# EAGLE board sensor-board (EAGLE 6.5.0)
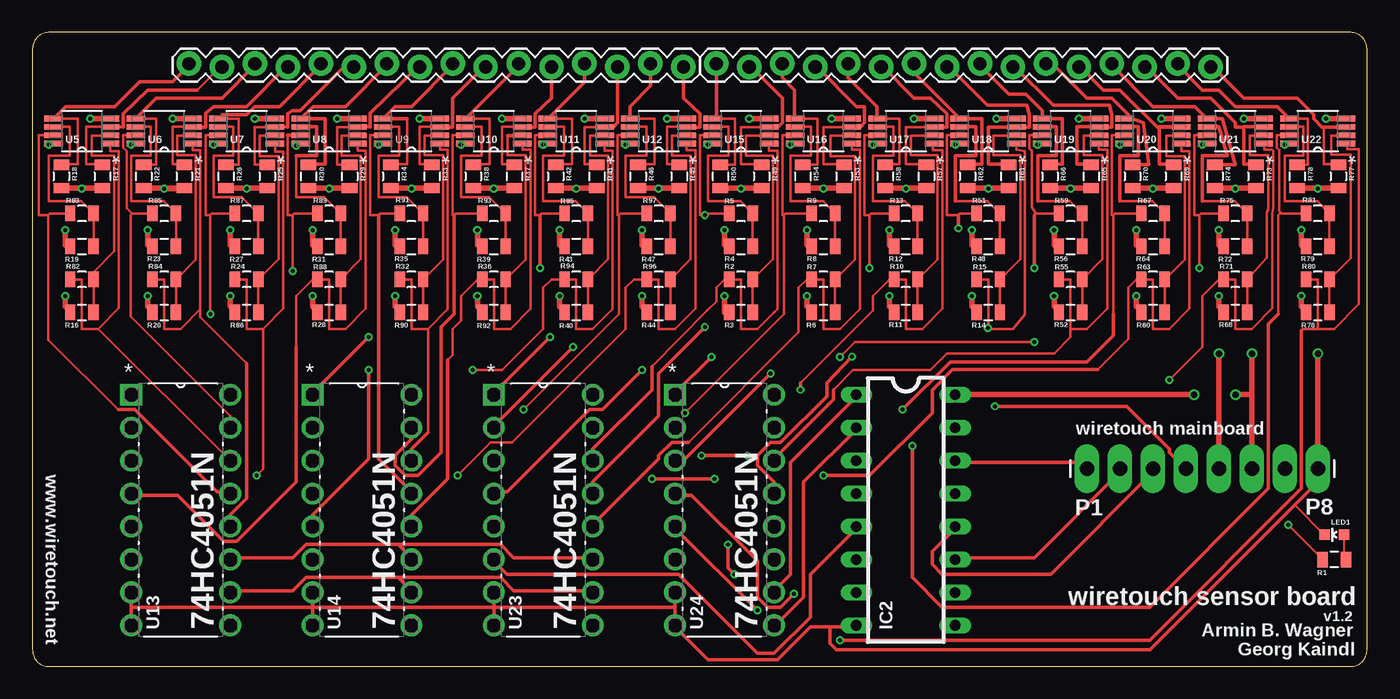
[diagram p0: board, top side]
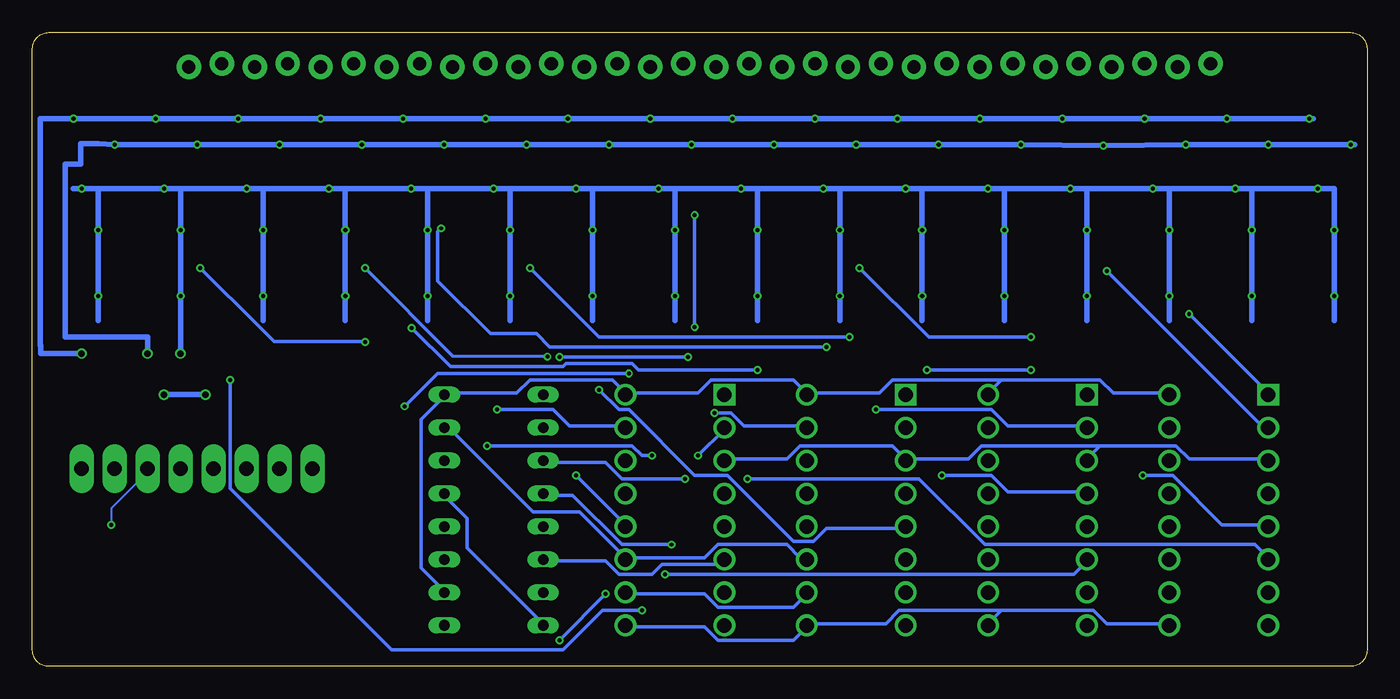
[diagram p1: board, bottom side, seen from below]

Size 102.86 x 48.88 mm. Coordinates in mm from the lower left corner, seen from the top.
Outline: 0,47.62 0,1.27 arc90 1.27,0 101.59,0 arc90 102.86,1.27 102.86,47.62 arc90 101.59,48.88 1.27,48.88 arc90 0,47.62
Copper layers (1*2*15*16): Top 0.035mm / dielectric 0.2mm / layer 2 0.0175mm / dielectric 1.1mm / layer 15 0.0175mm / dielectric 0.2mm / Bottom 0.035mm
Design rules "SeeedStudio_DRU_no_angle_20130527": minimum track width 6mil, minimum drill 12mil, track to track 6mil, track to pad 6mil, pad to pad 6mil, via to via 6mil, smd to smd 0mil, copper to edge 10mil, drill to drill 10mil, minimum pad ring 6mil, minimum via ring 6mil, stop-mask expansion 2mil, vias tented up to drill 25mil, thermal gap 10mil

## Footprints (pad centres in the part's own frame; a part is rotated, then mirrored left to right if it is on the bottom)
DIL16 = drill 0.813 long: 1 -8.89,-3.81; 2 -6.35,-3.81; 3 -3.81,-3.81; 4 -1.27,-3.81; 5 1.27,-3.81; 6 3.81,-3.81; 7 6.35,-3.81; 8 8.89,-3.81; 9 8.89,3.81; 10 6.35,3.81; 11 3.81,3.81; 12 1.27,3.81; 13 -1.27,3.81; 14 -3.81,3.81; 15 -6.35,3.81; 16 -8.89,3.81
1X16_LOCK = drill 1.016 pad 1.88: 1 0,0.127; 2 2.54,-0.127; 3 5.08,0.127; 4 7.62,-0.127; 5 10.16,0.127; 6 12.7,-0.127; 7 15.24,0.127; 8 17.78,-0.127; 9 20.32,0.127; 10 22.86,-0.127; 11 25.4,0.127; 12 27.94,-0.127; 13 30.48,0.127; 14 33.02,-0.127; 15 35.56,0.127; 16 38.1,-0.127
LED-0603 = smd 0.8 x 0.8: A 0,-0.75; C 0,0.75
1X08_LONGPADS = drill 1.118 pad 1.88 long: 1 0,0; 2 2.54,0; 3 5.08,0; 4 7.62,0; 5 10.16,0; 6 12.7,0; 7 15.24,0; 8 17.78,0
0805 = smd 0.8 x 1.2: 1 -0.9,0; 2 0.9,0
SOP65P490X110-8N = smd 1.422 x 0.432: 1 -2.184,0.965; 2 -2.184,0.33; 3 -2.184,-0.33; 4 -2.184,-0.965; 5 2.184,-0.965; 6 2.184,-0.33; 7 2.184,0.33; 8 2.184,0.965
DIP254P762X420-16 = drill 1.118 square: 1 -7.62,17.78 | drill 1.118: 2 -7.62,15.24; 3 -7.62,12.7; 4 -7.62,10.16; 5 -7.62,7.62; 6 -7.62,5.08; 7 -7.62,2.54; 8 -7.62,0; 9 0,0; 10 0,2.54; 11 0,5.08; 12 0,7.62; 13 0,10.16; 14 0,12.7; 15 0,15.24; 16 0,17.78

## Placement (x,y rotation side)
IC2  74LS595N  [DIL16]  67.31,12.06 270 top
JP2  P1  [1X16_LOCK]  12.06,46.35 0 top
JP3  P32  [1X16_LOCK]  52.7,46.35 0 top
LED1  [LED-0603]  100.33,10.16 90 top
MOTHERBOARD  [1X08_LONGPADS]  81.28,15.24 0 top
R1  1K  [0805]  100.33,8.26 180 top
R2  1K  [0805]  54.61,29.84 180 top
R3  100  [0805]  54.61,27.3 0 top
R4  100  [0805]  54.61,32.38 0 top
R5  1K  [0805]  54.61,34.92 180 top
R6  100  [0805]  60.96,27.3 0 top
R7  1K  [0805]  60.96,29.84 180 top
R8  100  [0805]  60.96,32.38 0 top
R9  1K  [0805]  60.96,34.92 180 top
R10  1K  [0805]  67.31,29.84 180 top
R11  100  [0805]  67.31,27.3 0 top
R12  100  [0805]  67.31,32.38 0 top
R13  1K  [0805]  67.31,34.92 180 top
R14  100  [0805]  73.66,27.3 0 top
R15  1K  [0805]  73.66,29.84 180 top
R16  100  [0805]  3.81,27.3 0 top
R17  150K  [0805]  5.4,37.78 270 top
R18  150K  [0805]  2.22,37.78 270 top
R19  100  [0805]  3.81,32.38 0 top
R20  100  [0805]  10.16,27.3 0 top
R21  150K  [0805]  11.71,37.78 270 top
R22  150K  [0805]  8.57,37.78 270 top
R23  100  [0805]  10.16,32.38 0 top
R24  1K  [0805]  16.51,29.84 180 top
R25  150K  [0805]  18.1,37.78 270 top
R26  150K  [0805]  14.92,37.78 270 top
R27  100  [0805]  16.51,32.38 0 top
R28  100  [0805]  22.86,27.3 0 top
R29  150K  [0805]  24.45,37.78 270 top
R30  150K  [0805]  21.27,37.78 270 top
R31  100  [0805]  22.86,32.38 0 top
R32  1K  [0805]  29.21,29.84 180 top
R33  150K  [0805]  30.8,37.78 270 top
R34  150K  [0805]  27.62,37.78 270 top
R35  100  [0805]  29.21,32.38 0 top
R36  1K  [0805]  35.56,29.84 180 top
R37  150K  [0805]  37.15,37.78 270 top
R38  150K  [0805]  33.97,37.78 270 top
R39  100  [0805]  35.56,32.38 0 top
R40  100  [0805]  41.91,27.3 0 top
R41  150K  [0805]  43.5,37.78 270 top
R42  150K  [0805]  40.32,37.78 270 top
R43  100  [0805]  41.91,32.38 0 top
R44  100  [0805]  48.26,27.3 0 top
R45  150K  [0805]  49.85,37.78 270 top
R46  150K  [0805]  46.67,37.78 270 top
R47  100  [0805]  48.26,32.38 0 top
R48  100  [0805]  73.66,32.38 0 top
R49  150K  [0805]  56.2,37.78 270 top
R50  150K  [0805]  53.02,37.78 270 top
R51  1K  [0805]  73.66,34.92 180 top
R52  100  [0805]  80.01,27.3 0 top
R53  150K  [0805]  62.55,37.78 270 top
R54  150K  [0805]  59.37,37.78 270 top
R55  1K  [0805]  80.01,29.84 180 top
R56  100  [0805]  80.01,32.38 0 top
R57  150K  [0805]  68.9,37.78 270 top
R58  150K  [0805]  65.72,37.78 270 top
R59  1K  [0805]  80.01,34.92 180 top
R60  100  [0805]  86.36,27.3 0 top
R61  150K  [0805]  75.25,37.78 270 top
R62  150K  [0805]  72.07,37.78 270 top
R63  1K  [0805]  86.36,29.84 180 top
R64  100  [0805]  86.36,32.38 0 top
R65  150K  [0805]  81.6,37.78 270 top
R66  150K  [0805]  78.42,37.78 270 top
R67  1K  [0805]  86.36,34.92 180 top
R68  100  [0805]  92.71,27.3 0 top
R69  150K  [0805]  87.95,37.78 270 top
R70  150K  [0805]  84.77,37.78 270 top
R71  1K  [0805]  92.71,29.84 180 top
R72  100  [0805]  92.71,32.38 0 top
R73  150K  [0805]  94.3,37.78 270 top
R74  150K  [0805]  91.12,37.78 270 top
R75  1K  [0805]  92.71,34.92 180 top
R76  100  [0805]  99.06,27.3 0 top
R77  150K  [0805]  100.65,37.78 270 top
R78  150K  [0805]  97.47,37.78 270 top
R79  100  [0805]  99.06,32.38 0 top
R80  1K  [0805]  99.06,29.84 180 top
R81  1K  [0805]  99.06,34.92 180 top
R82  1K  [0805]  3.81,29.84 180 top
R83  1K  [0805]  3.81,34.92 180 top
R84  1K  [0805]  10.16,29.84 180 top
R85  1K  [0805]  10.16,34.92 180 top
R86  100  [0805]  16.51,27.3 0 top
R87  1K  [0805]  16.51,34.92 180 top
R88  1K  [0805]  22.86,29.84 180 top
R89  1K  [0805]  22.86,34.92 180 top
R90  100  [0805]  29.21,27.3 0 top
R91  1K  [0805]  29.21,34.92 180 top
R92  100  [0805]  35.56,27.3 0 top
R93  1K  [0805]  35.56,34.92 180 top
R94  1K  [0805]  41.91,29.84 180 top
R95  1K  [0805]  41.91,34.92 180 top
R96  1K  [0805]  48.26,29.84 180 top
R97  1K  [0805]  48.26,34.92 180 top
U5  OPA2350EA/250  [SOP65P490X110-8N]  3.81,41.27 180 top
U6  OPA2350EA/250  [SOP65P490X110-8N]  10.16,41.27 180 top
U7  OPA2350EA/250  [SOP65P490X110-8N]  16.51,41.27 180 top
U8  OPA2350EA/250  [SOP65P490X110-8N]  22.86,41.27 180 top
U9  OPA2350EA/250  [SOP65P490X110-8N]  29.21,41.27 180 top
U10  OPA2350EA/250  [SOP65P490X110-8N]  35.56,41.27 180 top
U11  OPA2350EA/250  [SOP65P490X110-8N]  41.91,41.27 180 top
U12  OPA2350EA/250  [SOP65P490X110-8N]  48.26,41.27 180 top
U13  74HC4051N  [DIP254P762X420-16]  15.24,3.17 0 top
U14  74HC4051N  [DIP254P762X420-16]  29.21,3.17 0 top
U15  OPA2350EA/250  [SOP65P490X110-8N]  54.61,41.27 180 top
U16  OPA2350EA/250  [SOP65P490X110-8N]  60.96,41.27 180 top
U17  OPA2350EA/250  [SOP65P490X110-8N]  67.31,41.27 180 top
U18  OPA2350EA/250  [SOP65P490X110-8N]  73.66,41.27 180 top
U19  OPA2350EA/250  [SOP65P490X110-8N]  80.01,41.27 180 top
U20  OPA2350EA/250  [SOP65P490X110-8N]  86.36,41.27 180 top
U21  OPA2350EA/250  [SOP65P490X110-8N]  92.71,41.27 180 top
U22  OPA2350EA/250  [SOP65P490X110-8N]  99.06,41.27 180 top
U23  74HC4051N  [DIP254P762X420-16]  43.18,3.17 0 top
U24  74HC4051N  [DIP254P762X420-16]  57.15,3.17 0 top

## Library data of the parts
IC2 = SparkFun-DigitalIC
JP2 JP3 MOTHERBOARD = SparkFun-Connectors
LED1 = SparkFun-LED
R1-R97 = SparkFun-Passives
U5-U12 U15-U22 = gkaindl; MPN: OPA2350EA/250; OC_FARNELL: 1459568; OC_NEWARK: 74K3902; PACKAGE: MSOP-8; SUPPLIER: Texas Instruments
U13 U14 U23 U24 = gkaindl; MPN: 74HC4051N; OC_FARNELL: 380910; OC_NEWARK: 07WX3738; PACKAGE: DIP-16; SUPPLIER: NXP

## Nets
2.8V: MOTHERBOARD.5 R3.1 R4.1 R6.1 R8.1 R11.1 R12.1 R14.1 R16.1 R17.2 R18.2 R19.1 R20.1 R21.2 R22.2 R23.1 R25.2 R26.2 R27.1 R28.1 R29.2 R30.2 R31.1 R33.2 R34.2 R35.1 R37.2 R38.2 R39.1 R40.1 R41.2 R42.2 R43.1 R44.1 R45.2 R46.2 R47.1 R48.1 R49.2 R50.2 R52.1 R53.2 R54.2 R56.1 R57.2 R58.2 R60.1 R61.2 R62.2 R64.1 R65.2 R66.2 R68.1 R69.2 R70.2 R72.1 R73.2 R74.2 R76.1 R77.2 R78.2 R79.1 R86.1 R90.1 R92.1
5V: IC2.10 IC2.16 MOTHERBOARD.6 R1.2 U5.8 U6.8 U7.8 U8.8 U9.8 U10.8 U11.8 U12.8 U13.16 U14.16 U15.8 U16.8 U17.8 U18.8 U19.8 U20.8 U21.8 U22.8 U23.16 U24.16
DEMUX_IN: MOTHERBOARD.4 U13.3 U14.3 U23.3 U24.3
GND: IC2.8 IC2.13 LED1.C MOTHERBOARD.8 U5.4 U6.4 U7.4 U8.4 U9.4 U10.4 U11.4 U12.4 U13.7 U13.8 U14.7 U14.8 U15.4 U16.4 U17.4 U18.4 U19.4 U20.4 U21.4 U22.4 U23.7 U23.8 U24.7 U24.8
N$1: LED1.A R1.1
N$2: R2.1 R3.2 U15.2
N$3: R4.2 R5.1 U15.6
N$4: R6.2 R7.1 U16.2
N$5: R8.2 R9.1 U16.6
N$6: R10.1 R11.2 U17.2
N$7: R12.2 R13.1 U17.6
N$8: R14.2 R15.1 U18.2
N$9: R48.2 R51.1 U18.6
N$10: R52.2 R55.1 U19.2
N$11: R56.2 R59.1 U19.6
N$12: R60.2 R63.1 U20.2
N$13: R64.2 R67.1 U20.6
N$14: R68.2 R71.1 U21.2
N$15: R72.2 R75.1 U21.6
N$16: R76.2 R80.1 U22.2
N$17: R79.2 R81.1 U22.6
N$18: R16.2 R82.1 U5.2
N$19: R19.2 R83.1 U5.6
N$20: R20.2 R84.1 U6.2
N$21: R23.2 R85.1 U6.6
N$22: R24.1 R86.2 U7.2
N$23: R27.2 R87.1 U7.6
N$24: R82.2 U5.1 U13.14
N$25: R83.2 U5.7 U13.13
N$26: R84.2 U6.1 U13.12
N$27: R28.2 R88.1 U8.2
N$28: JP2.2 R17.1 U5.3
N$29: JP2.1 R18.1 U5.5
N$30: R31.2 R89.1 U8.6
N$31: R85.2 U6.7 U13.15
N$32: R32.1 R90.2 U9.2
N$33: JP2.4 R21.1 U6.3
N$34: JP2.3 R22.1 U6.5
N$35: R35.2 R91.1 U9.6
N$36: R24.2 U7.1 U13.5
N$37: R87.2 U7.7 U13.1
N$38: R36.1 R92.2 U10.2
N$39: JP2.6 R25.1 U7.3
N$40: JP2.5 R26.1 U7.5
N$41: R39.2 R93.1 U10.6
N$42: R88.2 U8.1 U13.4
N$43: R89.2 U8.7 U13.2
N$44: R40.2 R94.1 U11.2
N$45: R32.2 U9.1 U14.14
N$46: JP2.7 R30.1 U8.5
N$47: R44.2 R96.1 U12.2
N$48: JP2.8 R29.1 U8.3
N$49: R91.2 U9.7 U14.13
N$50: R47.2 R97.1 U12.6
N$51: JP2.9 R34.1 U9.5
N$53: JP2.10 R33.1 U9.3
N$54: R36.2 U10.1 U14.12
N$55: R93.2 U10.7 U14.15
N$57: JP2.11 R38.1 U10.5
N$59: JP2.12 R37.1 U10.3
N$60: R94.2 U11.1 U14.5
N$61: R95.2 U11.7 U14.1
N$63: JP2.13 R42.1 U11.5
N$64: R43.2 R95.1 U11.6
N$65: JP2.14 R41.1 U11.3
N$66: R96.2 U12.1 U14.4
N$67: R97.2 U12.7 U14.2
N$69: JP2.15 R46.1 U12.5
N$71: JP2.16 R45.1 U12.3
N$72: R2.2 U15.1 U23.14
N$73: IC2.15 U13.11 U14.11 U23.11 U24.11
N$74: IC2.1 U13.10 U14.10 U23.10 U24.10
N$75: IC2.2 U13.9 U14.9 U23.9 U24.9
N$76: IC2.3 U13.6
N$77: IC2.4 U14.6
N$78: R5.2 U15.7 U23.13
N$80: JP3.2 R49.1 U15.3
N$81: JP3.1 R50.1 U15.5
N$83: R7.2 U16.1 U23.12
N$84: R9.2 U16.7 U23.15
N$86: JP3.4 R53.1 U16.3
N$87: JP3.3 R54.1 U16.5
N$89: R10.2 U17.1 U23.5
N$90: R13.2 U17.7 U23.1
N$92: JP3.6 R57.1 U17.3
N$93: JP3.5 R58.1 U17.5
N$95: R15.2 U18.1 U23.4
N$96: R51.2 U18.7 U23.2
N$98: JP3.7 R62.1 U18.5
N$100: JP3.8 R61.1 U18.3
N$101: R55.2 U19.1 U24.14
N$102: R59.2 U19.7 U24.13
N$104: JP3.9 R66.1 U19.5
N$106: JP3.10 R65.1 U19.3
N$107: R63.2 U20.1 U24.12
N$108: R67.2 U20.7 U24.15
N$110: JP3.11 R70.1 U20.5
N$112: JP3.12 R69.1 U20.3
N$113: R71.2 U21.1 U24.5
N$114: R75.2 U21.7 U24.1
N$116: JP3.13 R74.1 U21.5
N$118: JP3.14 R73.1 U21.3
N$119: R80.2 U22.1 U24.4
N$120: R81.2 U22.7 U24.2
N$122: JP3.15 R78.1 U22.5
N$124: JP3.16 R77.1 U22.3
N$125: IC2.5 U23.6
N$126: IC2.6 U24.6
N$127: IC2.12 MOTHERBOARD.3
SHIFT_CLK: IC2.11 MOTHERBOARD.2
SHIFT_SER: IC2.14 MOTHERBOARD.1

## Tracks (layer width: path | path; a pad name or v marks a point on that pad's centre or on a via)
2.8V  (via drill 0.32, 0.5)
  Top 0.191: v53.34,33.66 53.34,32.38 R4.1 | R6.1 60.06,27.57 59.69,27.94 | R8.1 59.69,32.38 v59.69,33.66 | R11.1 66.41,27.57 66.04,27.94 | R12.1 66.04,32.38 v66.04,33.66 | R14.1 72.76,27.57 72.39,27.94 | R48.1 72.39,32.38 v72.39,33.66 | R52.1 79.11,27.57 78.74,27.94 | R56.1 78.74,32.38 v78.74,33.66 | R60.1 85.46,27.57 85.09,27.94 | R64.1 85.09,32.38 v85.09,33.66 | R68.1 91.81,27.57 91.44,27.94 | R72.1 91.44,32.38 v91.44,33.66 | R76.1 98.16,27.57 97.79,27.94 | R79.1 97.79,32.38 v97.79,33.66 | R16.1 2.91,27.57 2.54,27.94 | R19.1 2.54,32.38 2.54,33.02 | R20.1 9.26,27.57 8.89,27.94 | R23.1 9.26,32.65 8.89,33.02 | R86.1 15.61,27.57 15.24,27.94 | R27.1 15.24,32.38 15.24,33.02 | R28.1 21.96,27.57 21.59,27.94 | R31.1 21.59,32.38 21.59,33.02 | R90.1 28.31,27.57 27.94,27.94 | R35.1 27.94,32.38 27.94,33.02 | R92.1 34.66,27.57 34.29,27.94 | R39.1 34.29,32.38 v34.29,33.66 | R40.1 41.01,27.57 40.64,27.94 | R43.1 40.64,32.38 v40.64,33.66 | R44.1 47.36,27.57 46.99,27.94 | R47.1 46.99,32.38 v46.99,33.66
  Top 0.254: R17.2 5.08,36.88 5.08,36.83
  Top 0.406: R18.2 3.81,36.88 | v10.16,36.83 11.75,36.83 R21.2 R22.2 | 5.08,36.88 3.81,36.88 | 3.81,36.88 v3.81,36.83 | R25.2 16.51,36.88 | R26.2 16.51,36.88 | 16.51,36.88 v16.51,36.83 | R29.2 22.86,36.88 | R30.2 22.86,36.88 | 22.86,36.88 v22.86,36.83 | R33.2 29.21,36.88 | R34.2 29.21,36.88 | 29.21,36.88 v29.21,36.83 | R38.2 35.56,36.88 | R37.2 35.56,36.88 | 35.56,36.88 v35.56,36.83 | R42.2 41.91,36.88 | R41.2 41.91,36.88 | 41.91,36.88 v41.91,36.83 | R46.2 48.26,36.88 | R45.2 48.26,36.88 | 48.26,36.88 v48.26,36.83 | R50.2 54.61,36.88 | R49.2 54.61,36.88 | 54.61,36.88 v54.61,36.83 | R54.2 60.96,36.88 | R53.2 60.96,36.88 | 60.96,36.88 v60.96,36.83 | R58.2 67.31,36.88 | R57.2 67.31,36.88 | 67.31,36.88 v67.31,36.83 | R62.2 73.66,36.88 | R61.2 73.66,36.88 | 73.66,36.88 v73.66,36.83 | R66.2 80.01,36.88 | R65.2 80.01,36.88 | 80.01,36.88 v80.01,36.83 | R70.2 86.36,36.88 | R69.2 86.36,36.88 | 86.36,36.88 v86.36,36.83 | R74.2 92.71,36.88 | R73.2 92.71,36.88 | 92.71,36.88 v92.71,36.83 | R78.2 99.06,36.88 | R77.2 99.06,36.88 | 99.06,36.88 v99.06,36.83 | 2.54,27.74 2.54,27.94 v2.54,28.57 | 2.54,32.5 2.54,33.02 v2.54,33.66 | 8.89,27.74 8.89,27.94 v8.89,28.57 | 8.89,32.5 8.89,33.02 v8.89,33.66 | 15.24,27.74 15.24,27.94 v15.24,28.57 | 15.24,32.5 15.24,33.02 v15.24,33.66 | 21.59,27.74 21.59,27.94 v21.59,28.57 | 21.59,32.5 21.59,33.02 v21.59,33.66 | 27.94,27.74 27.94,27.94 v27.94,28.57 | 27.94,32.5 27.94,33.02 v27.94,33.66 | 34.29,27.74 34.29,27.94 v34.29,28.57 | 34.29,32.5 v34.29,33.66 | 40.64,27.74 40.64,27.94 v40.64,28.57 | 40.64,32.5 v40.64,33.66 | 46.99,27.74 46.99,27.94 v46.99,28.57 | 46.99,32.5 v46.99,33.66 | v53.34,28.57 53.34,27.3 R3.1 | 53.34,32.5 v53.34,33.66 | 59.69,27.74 59.69,27.94 v59.69,28.57
  Top 0.406: 59.69,32.5 v59.69,33.66 | 66.04,27.74 66.04,27.94 v66.04,28.57 | 66.04,32.5 v66.04,33.66 | 72.39,27.74 72.39,27.94 v72.39,28.57 | 72.39,32.5 v72.39,33.66 | 78.74,27.74 78.74,27.94 v78.74,28.57 | 78.74,32.5 v78.74,33.66 | 85.09,27.74 85.09,27.94 v85.09,28.57 | 85.09,32.5 v85.09,33.66 | 91.44,27.74 91.44,27.94 v91.44,28.57 | 91.44,32.5 v91.44,33.66 | 97.79,27.74 97.79,27.94 v97.79,28.57 | 97.79,32.5 v97.79,33.66 | MOTHERBOARD.5 v91.44,24.13
  Bottom 0.406: 8.89,36.83 v3.81,36.83 2.54,36.83 v2.54,33.66 v2.54,28.57 2.54,26.67 | 8.89,36.83 v10.16,36.83 15.24,36.83 | 15.24,36.83 v16.51,36.83 21.59,36.83 | 21.59,36.83 v22.86,36.83 27.94,36.83 | 27.94,36.83 v29.21,36.83 34.29,36.83 | 34.29,36.83 v35.56,36.83 40.64,36.83 | 40.64,36.83 v41.91,36.83 46.99,36.83 | 46.99,36.83 v48.26,36.83 53.34,36.83 | 53.34,36.83 v54.61,36.83 59.69,36.83 | 59.69,36.83 v60.96,36.83 66.04,36.83 | 66.04,36.83 v67.31,36.83 72.39,36.83 | 72.39,36.83 v73.66,36.83 78.74,36.83 | 78.74,36.83 v80.01,36.83 85.09,36.83 | 85.09,36.83 v86.36,36.83 91.44,36.83 | 91.44,36.83 v92.71,36.83 97.79,36.83 | 97.79,36.83 v99.06,36.83 99.69,36.83 | 8.89,36.83 v8.89,33.66 v8.89,28.57 8.89,26.67 | 15.24,36.83 v15.24,33.66 v15.24,28.57 15.24,26.67 | 21.59,36.83 v21.59,33.66 v21.59,28.57 21.59,26.67 | 27.94,36.83 v27.94,33.66 v27.94,28.57 27.94,26.67 | 34.29,36.83 v34.29,33.66 v34.29,28.57 34.29,26.67 | 40.64,36.83 v40.64,33.66 v40.64,28.57 40.64,26.67 | 46.99,36.83 v46.99,33.66 v46.99,28.57 46.99,26.67 | 53.34,36.83 v53.34,33.66 v53.34,28.57 53.34,26.67 | 59.69,36.83 v59.69,33.66 v59.69,28.57 59.69,26.67 | 66.04,36.83 v66.04,33.66 v66.04,28.57 66.04,26.67 | 72.39,36.83 v72.39,33.66 v72.39,28.57 72.39,26.67 | 78.74,36.83 v78.74,33.66 v78.74,28.57 78.74,26.67 | 85.09,36.83 v85.09,33.66 v85.09,28.57 85.09,26.67 | 91.44,36.83 v91.44,33.66 v91.44,28.57 v91.44,24.13 | 97.79,36.83 v97.79,33.66 v97.79,28.57 97.79,26.67
5V  (via drill 0.3, 0.32, 0.5)
  Top 0.152: v96.77,10.92 99.31,8.38 R1.2
  Top 0.254: 1.3,40.27 1.3,40.31 U5.8 1.27,40.31 v1.27,40.24 | U6.8 7.62,40.31 v7.62,40.24 | U7.8 13.97,40.31 v13.97,40.24 | U8.8 20.32,40.31 v20.32,40.16 | U9.8 26.67,40.31 v26.67,40.24 | U10.8 33.02,40.31 v33.02,40.24 | U11.8 39.37,40.31 v39.37,40.24 | U12.8 45.72,40.31 v45.72,40.24 | U15.8 52.07,40.31 v52.07,40.24 | U16.8 58.42,40.31 v58.42,40.24 | U17.8 64.77,40.31 v64.77,40.24 | U18.8 71.12,40.31 v71.12,40.24 | U19.8 77.47,40.31 v77.47,40.24 | U20.8 83.82,40.31 v83.82,40.24 | U21.8 90.17,40.31 v90.17,40.24 | U22.8 96.52,40.31 v96.52,40.24
  Top 0.406: MOTHERBOARD.6 93.98,20.95 | 93.98,20.95 v93.98,24.13 | IC2.16 v89.53,20.95 | v92.71,20.95 93.98,20.95
  Bottom 0.152: v96.77,10.92 96.77,12.19 93.98,14.99 MOTHERBOARD.6
  Bottom 0.254: IC2.10 71.12,5.84 72.9,7.62 72.9,19.05 71.12,20.83 IC2.16 71.12,21.08 65.53,21.08 64.52,22.1 58.17,22.1 57.15,21.08 | 28.19,22.1 20.57,22.1 19.56,21.08 15.24,21.08 U13.16 | 28.19,22.1 29.21,21.08 U14.16 | 43.18,21.08 37.59,21.08 36.58,22.1 28.19,22.1 | 57.15,21.08 51.56,21.08 50.55,22.1 44.2,22.1 43.18,21.08 | 43.18,21.08 U23.16 | 57.15,21.08 U24.16
  Bottom 0.406: 0.95,40.24 v1.27,40.24 v7.62,40.24 v13.97,40.24 v20.32,40.16 v26.67,40.24 v33.02,40.24 v39.37,40.24 v45.72,40.24 v52.07,40.24 v58.42,40.24 v64.77,40.24 v71.12,40.24 v77.47,40.24 v83.82,40.24 v90.17,40.24 v96.52,40.24 97.79,40.32 97.79,40.33 99.14,40.33 99.14,38.73 100.33,38.73 100.33,25.4 93.98,25.4 v93.98,24.13 | v89.53,20.95 v92.71,20.95
DEMUX_IN  (via drill 0.3)
  Top 0.254: MOTHERBOARD.4 87.63,16.51 87.63,16.76 84.33,20.07 v74.17,20.07 | v56.9,22.61 50.29,16 49.53,16 U24.3
  Bottom 0.254: 20.57,17.02 14.73,17.02 13.72,16 7.62,16 U13.3 | 20.57,17.02 21.59,16 U14.3 | 35.56,16 30.73,16 29.72,17.02 20.57,17.02 | 35.56,16 36.58,17.02 43.69,17.02 44.7,16 49.53,16 U24.3 | 35.56,16 U23.3 | v74.17,20.07 71.63,22.61 v56.9,22.61
GND  (via drill 0.32, 0.5)
  Top 0.152: 97.28,12.45 99.57,10.16 LED1.C
  Top 0.254: U24.7 49.53,4.57 | 49.53,4.57 U24.8 49.53,3.05 52.07,0.51 57.4,0.51 59.94,3.05 61.47,3.05 | U23.7 35.56,4.57 | 35.56,4.57 U23.8 | U13.7 7.62,4.57 | 7.62,4.57 U13.8 | U14.7 21.59,4.57 | 21.59,4.57 U14.8 | 21.59,4.57 7.62,4.57 | 21.59,4.57 35.56,4.57 | 35.56,4.57 49.53,4.57 | 61.47,3.05 63.5,3.05 IC2.8 | 61.47,3.05 61.47,1.78 61.98,1.27 86.11,1.27 97.28,12.45 99.06,14.22 MOTHERBOARD.8
  Top 0.406: U5.4 v4.45,42.24 v4.45,42.23 | v10.79,42.23 12.34,42.23 U6.4 | U7.4 v17.14,42.24 v17.14,42.23 | U8.4 v23.5,42.24 v23.5,42.23 | U9.4 v29.84,42.24 v29.84,42.23 | U10.4 v36.2,42.24 v36.2,42.23 | U11.4 v42.55,42.24 v42.55,42.23 | U12.4 v48.9,42.24 v48.9,42.23 | U15.4 v55.24,42.24 v55.24,42.23 | U18.4 v74.3,42.24 v74.3,42.23 | U19.4 v80.64,42.24 v80.64,42.23 | U20.4 v87,42.24 v87,42.23 | U21.4 v93.34,42.24 v93.34,42.23 | U22.4 v99.69,42.24 v99.69,42.23 | U17.4 v67.94,42.24 v67.94,42.23 | MOTHERBOARD.8 v99.06,24.13 | U16.4 61.61,42.24 v61.59,42.23
  Bottom 0.254: IC2.8 63.5,3.3 69.34,9.14 69.34,11.43 71.12,13.21 IC2.13
  Bottom 0.406: v4.45,42.23 4.13,42.23 | v4.45,42.23 v10.79,42.23 | v4.45,42.23 v17.14,42.23 v23.5,42.23 v29.84,42.23 v36.2,42.23 v42.55,42.23 v48.9,42.23 v55.24,42.23 v61.59,42.23 v67.94,42.23 v74.3,42.23 v80.64,42.23 v87,42.23 v93.34,42.23 v99.69,42.23 100.33,42.23 | 100.33,42.23 101.28,42.23 | v99.06,24.13 102.23,24.13 102.23,24.77 102.26,24.77 102.26,42.24 100.33,42.24 100.33,42.23
N$1
  Top 0.152: LED1.A 101.09,10.16 101.09,8.38 R1.1
N$2
  Top 0.191: U15.2 55,40.95 55,39.39 57.06,39.39 57.06,31.39 R2.1 | R3.2 R2.1 | 55.55,29.8 R2.1
N$3
  Top 0.191: U15.6 53.66,41.6 53.66,39.37 52.07,39.37 52.07,35.88 54.56,35.88 R5.1 R4.2
N$4
  Top 0.191: U16.2 61.48,40.95 61.48,39.34 63.4,39.34 63.4,31.38 R7.1 | R6.2 R7.1 | 61.9,29.89 R7.1
N$5
  Top 0.191: U16.6 60.01,41.6 60.01,39.37 58.42,39.37 58.42,35.88 60.96,35.88 60.96,35.83 R9.1 R8.2
N$6
  Top 0.191: U17.2 67.7,40.95 67.7,39.42 69.75,39.42 69.75,31.39 R10.1 R11.2
N$7
  Top 0.191: U17.6 66.36,41.6 66.36,39.37 64.77,39.37 64.77,35.88 67.26,35.88 R13.1 R12.2
N$8
  Top 0.191: U18.2 74.04,40.95 74.04,39.42 76.12,39.42 76.12,31.41 R15.1 R14.2
N$9
  Top 0.191: R48.2 R51.1 73.61,35.88 71.12,35.88
  Top 0.254: U18.6 72.71,41.6 72.71,39.37 71.12,39.37 71.12,35.88
N$10
  Top 0.191: U19.2 81.05,40.95 81.05,39.44 82.47,39.44 82.47,31.4 R55.1 R52.2
N$11
  Top 0.191: R56.2 R59.1 79.96,35.88 77.47,35.88
  Top 0.254: U19.6 78.9,41.6 78.9,39.37 77.47,39.37 77.47,35.88
N$12
  Top 0.191: U20.2 87.38,40.95 87.38,39.36 88.82,39.36 88.82,31.39 88.81,31.39 R63.1 R60.2
N$13
  Top 0.191: 83.82,35.88 86.31,35.88 R67.1 R64.2
  Top 0.254: U20.6 85.25,41.6 85.25,39.37 83.82,39.37 83.82,35.88
N$14
  Top 0.191: U21.2 93.84,40.95 93.84,39.42 95.25,39.41 95.25,35.28 95.13,35 95.13,31.52 R71.1 R68.2
N$15
  Top 0.191: 90.17,35.88 92.66,35.88 R75.1 R72.2
  Top 0.254: U21.6 91.44,41.6 92.08,39.37 90.17,39.37 90.17,35.88
N$16
  Top 0.191: U22.2 100.1,40.95 100.1,39.47 101.6,39.47 101.6,31.48 R80.1 R76.2
N$17
  Top 0.191: U22.6 97.95,41.6 97.95,39.37 96.52,39.37 96.52,35.88 99.01,35.88 R81.1 R79.2
N$18
  Top 0.191: U5.2 4.56,40.95 4.56,39.38 6.31,39.38 6.31,32.03 4.71,30.43 R82.1 R16.2
N$19
  Top 0.191: U5.6 2.86,41.6 2.86,39.37 1.27,39.37 1.27,35.88 3.76,35.88 R83.1 R19.2
N$20
  Top 0.191: U6.2 11.14,40.95 11.14,39.43 12.58,39.43 12.58,31.37 R84.1 R20.2
N$21
  Top 0.191: U6.6 9.13,41.6 9.13,39.37 7.62,39.37 7.62,35.88 10.11,35.88 R85.1 R23.2
N$22
  Top 0.191: U7.2 17.51,40.95 17.51,39.35 18.96,39.35 18.96,31.4 R24.1 R86.2
N$23
  Top 0.191: U7.6 15.48,41.6 15.48,39.37 13.97,39.37 13.97,36.2 16.14,36.2 R87.1 R27.2
N$24
  Top 0.191: 6,40.31 6,39.73 6.67,39.73 6.67,27.62 5.08,26.04 | 5.08,26.04 3.81,26.04 3.81,29.84 R82.2 | 5.08,26.04 U13.14
  Top 0.254: U5.1 6,40.31
N$25
  Top 0.191: 1.23,34.81 0.48,34.81 0.48,40.96 0.95,40.96 | 6.6,19.81 1.23,25.19 1.23,34.81 | R83.2 1.35,34.92 1.23,34.81
  Top 0.254: U5.7 0.95,40.95 0.95,40.96 | 6.6,19.81 7.87,19.81 14.22,13.46 15.24,13.46 U13.13
N$26
  Top 0.191: 12.35,40.31 12.35,39.8 12.94,39.8 12.94,27.54 | 12.94,27.54 11.43,26.04 10.16,26.04 10.16,29.84 R84.2 | 12.94,27.54 12.94,26.94 16.51,23.37
  Top 0.254: U6.1 12.35,40.31 | U13.12 15.24,11.68 16.51,12.95 16.51,23.37
N$27
  Top 0.191: U8.2 23.84,40.95 23.84,39.4 25.31,39.4 25.31,31.4 R88.1 R28.2
N$28
  Top 0.191: U5.3 4.13,41.6 4.13,38.73 5.4,38.73 | 14.48,46.23 12.7,44.45
  Top 0.254: 5.4,38.73 R17.1 | U5.3 6.99,41.59 6.99,42.62 8.89,44.45 12.7,44.45 | JP2.2 14.48,46.23
N$29
  Top 0.191: U5.5 3.49,42.24 3.49,38.73 2.22,38.73
  Top 0.254: 2.22,38.73 R18.1 | JP2.1 12.06,46.35 10.79,45.09 8.26,45.09 6.35,43.18 2.56,43.18 U5.5
N$30
  Top 0.191: 20.32,39.37 20.32,36.2 22.49,36.2 R89.1 R31.2
  Top 0.254: U8.6 21.91,41.6 21.91,39.37 20.32,39.37
N$31
  Top 0.191: 7.98,40.96 6.99,40.96 6.99,40.01 7.26,39.73 7.26,35.36 7.7,34.92 | U13.15 15.24,19.3 7.58,26.96 7.58,34.81 7.7,34.92 | R85.2 7.7,34.92
  Top 0.254: 7.98,40.96 U6.7
N$32
  Top 0.191: U9.2 30.22,40.95 30.22,39.42 31.65,39.42 31.65,31.39 R32.1 R90.2
N$33
  Top 0.191: U6.3 10.79,41.6 10.79,38.73 11.11,38.73 11.11,38.68 R21.1
  Top 0.254: JP2.4 19.56,46.23 16.51,43.18 13.97,43.18 13.34,42.66 13.34,41.59 12.36,41.59 U6.3
N$34
  Top 0.191: R22.1 9.53,38.68 9.53,42.23 7.98,42.23
  Top 0.254: 7.98,42.23 U6.5 9.55,43.81 14.61,43.81 17.14,46.35 JP2.3
N$35
  Top 0.191: U9.6 28.26,41.6 28.26,39.37 26.67,39.37 26.67,36.2 28.84,36.2 R91.1 R35.2
N$36  (via drill 0.3)
  Top 0.191: U7.1 18.7,39.7 19.32,39.7 19.32,27.58 17.78,26.04 | 17.78,26.04 16.51,26.04 16.51,29.84 R24.2 | 17.78,26.04 17.78,15.24 v17.27,14.73
  Top 0.254: U7.1
  Bottom 0.254: v17.27,14.73 14.99,14.73 11.18,10.92 7.62,10.92 U13.5
N$37  (via drill 0.3)
  Top 0.191: 13.72,34.81 13.34,34.81 13.34,40.96 14.33,40.96 | 13.72,34.81 v13.72,27.18 | R87.2 13.83,34.92 13.72,34.81
  Top 0.254: 14.33,40.96 U7.7
  Bottom 0.254: v13.72,27.18 7.62,21.08 U13.1
N$38
  Top 0.191: 36.6,40.95 36.6,39.42 38.01,39.42 38.01,31.39 R36.1 R92.2
  Top 0.254: U10.2 36.6,40.95
N$39
  Top 0.191: R25.1 17.14,38.68 17.14,41.59 18.69,41.59
  Top 0.254: 18.69,41.59 U7.3 19.68,41.59 19.68,42.62 20,42.86 20.64,42.86 24,46.23 JP2.6
N$40
  Top 0.191: R26.1 15.88,38.68 15.88,42.23 14.92,42.23 | 14.63,42.55 U7.5
  Top 0.254: U7.5 14.92,42.24 14.92,42.23 | JP2.5 22.23,46.35 19.05,43.18 17.14,43.18 16.51,42.55 14.63,42.55
N$41
  Top 0.191: U10.6 34.61,41.6 34.61,39.37 33.02,39.37 33.02,36.2 35.19,36.2 R93.1 R39.2
N$42
  Top 0.191: U8.1 25.05,39.77 25.68,39.77 25.68,27.59 24.13,26.04 22.86,26.04 22.86,29.84 R88.2 21.59,29.84 20.32,28.57 20.32,24.64
  Top 0.254: U8.1 | 20.32,24.64 20.32,14.22 15.75,9.65 14.73,9.65 11.18,13.21 7.62,13.21 U13.4
N$43  (via drill 0.3)
  Top 0.191: 20.07,34.81 19.68,34.81 19.68,40.96 | 20.07,34.81 v20.07,30.48 | R89.2 20.18,34.92 20.07,34.81
  Top 0.254: 19.68,40.96 20,40.96 20,40.95 U8.7
  Bottom 0.254: v20.07,30.48 8.13,18.54 7.62,18.54 U13.2
N$44
  Top 0.191: U11.2 42.97,40.95 42.97,39.39 44.37,39.39 44.37,31.4 R94.1 R40.2
N$45
  Top 0.191: 31.41,40.31 31.41,39.84 32.01,39.84 32.01,27.56 30.48,26.04 | 30.48,26.04 29.21,26.04 29.21,29.84 R32.2 | 30.48,26.04 30.48,18.03
  Top 0.254: U9.1 31.41,40.31 | U14.14 29.21,16.76 30.48,18.03
N$46
  Top 0.254: JP2.7 27.3,46.35 24.13,43.18 21.61,43.18 U8.5 22.54,42.24 22.54,38.73 21.27,38.73 R30.1
N$47
  Top 0.191: U12.2 49.31,40.95 49.31,39.37 50.71,39.37 50.71,31.4 R96.1 R44.2
N$48
  Top 0.191: R29.1 23.5,38.68 23.5,41.59 25.04,41.59
  Top 0.254: 26.04,41.59 26.02,41.6 26.04,41.62 | 25.04,41.59 U8.3 25.06,41.62 26.04,41.62 | JP2.8 29.72,46.23 26.04,42.66 26.04,41.62
N$49
  Top 0.191: 26.35,40.96 26.04,40.96 26.04,34.81 26.67,34.81 26.79,34.92 R91.2
  Top 0.254: U9.7 26.35,40.95 26.35,40.96 | 26.67,34.81 26.67,16 29.21,13.46 U14.13
N$50
  Top 0.191: U12.6 47.31,41.6 47.31,39.37 45.72,39.37 45.72,36.2 47.89,36.2 R97.1 R47.2
N$51
  Top 0.191: 28.89,42.24 28.89,38.73 27.62,38.73
  Top 0.254: JP2.9 32.38,46.35 29.21,43.18 27.96,43.18 U9.5 28.89,42.24 | 27.62,38.73 R34.1
N$53
  Top 0.191: U9.3 29.84,41.6 29.84,38.73 30.8,38.73
  Top 0.254: 30.8,38.73 R33.1 | JP2.10 34.8,46.23 32.38,43.81 32.38,41.59 31.41,41.59 U9.3
N$54
  Top 0.191: 37.77,40.31 37.77,39.87 38.39,39.87 38.39,27.59 36.83,26.04 35.56,26.04 35.56,29.84 R36.2 34.29,29.84 33.02,28.57 33.02,26.67 32.38,26.04 32.38,24 32,23.62
  Top 0.254: U10.1 37.77,40.31 | U14.12 29.21,11.68 32,14.48 32,23.62
N$55
  Top 0.191: 32.38,34.81 32.38,34.92 | 32.38,34.92 32.38,40.96 33.38,40.96 | 32.38,34.92 32.5,34.81 32.51,34.81 32.63,34.92 R93.2
  Top 0.254: 33.38,40.96 U10.7 | U14.15 29.21,17.53 27.94,16.26 27.94,15.49 28.7,14.73 29.72,14.73 31.5,16.51 31.5,26.16 32.51,27.18 32.51,34.81
N$57
  Top 0.191: U10.5 35.24,42.24 35.24,38.73 33.97,38.73
  Top 0.254: JP2.11 37.47,46.33 U10.5 | 33.97,38.73 R38.1
N$59
  Top 0.191: U10.3 36.2,41.6 36.2,38.73 37.15,38.73
  Top 0.254: 37.15,38.73 R37.1 | 38.1,41.59 38.1,41.6 U10.3 37.76,41.59 38.73,41.59 38.73,42.62 40.01,43.81 JP2.12
N$60  (via drill 0.3)
  Top 0.191: U11.1 44.08,39.77 44.72,39.77 44.72,27.58 43.18,26.04 41.91,26.04 41.91,29.84 R94.2 40.01,29.84 39.37,29.21 39.37,26.04 36.2,22.86 v33.91,22.86
  Top 0.254: U11.1 | U14.5 21.59,11.68 25.91,16 v25.91,22.86
  Bottom 0.254: v33.91,22.86 v25.91,22.86
N$61  (via drill 0.3)
  Top 0.191: 39.73,40.96 38.73,40.96 38.73,34.81 39.12,34.81 39.23,34.92 R95.2
  Top 0.254: 39.73,40.96 U11.7 | v25.91,25.4 21.59,21.08 U14.1 | 39.12,34.81 v39.12,30.73
  Bottom 0.254: v25.91,25.4 33.78,25.4 v39.12,30.73
N$63
  Top 0.191: U11.5 41.59,42.24 41.59,38.73 40.32,38.73
  Top 0.254: JP2.13 42.55,45.06 U11.5 | 40.32,38.73 R42.1
N$64
  Top 0.191: U11.6 40.96,41.6 40.96,39.37 39.37,39.37 39.37,35.88 41.86,35.88 R95.1 R43.2
N$65
  Top 0.191: 44.77,41.59 44.11,41.59 42.55,41.59 42.55,38.73 43.5,38.73
  Top 0.254: JP2.14 45.09,41.91 44.77,41.59 | U11.3 44.11,41.59 | 43.5,38.73 R41.1
N$66  (via drill 0.3)
  Top 0.191: 50.4,40.31 50.4,39.8 51.09,39.8 51.09,27.59 49.53,26.04 48.26,26.04 48.26,29.84 R96.2 46.35,29.84 45.72,29.21 45.72,26.04 36.96,17.27 35.31,17.27 v32.77,14.73
  Top 0.254: U12.1 50.4,40.31
  Bottom 0.254: v32.77,14.73 28.96,14.73 27.69,13.46 21.59,13.46 U14.4
N$67  (via drill 0.3)
  Top 0.191: 45.21,34.81 45.09,34.81 45.09,40.96 46.08,40.96 | v37.85,19.81 45.21,27.18 45.21,34.81 | R97.2 45.33,34.92 45.21,34.81
  Top 0.254: 46.08,40.96 U12.7
  Bottom 0.254: v37.85,19.81 28.96,19.81 27.69,18.54 21.59,18.54 U14.2
N$69
  Top 0.191: U12.5 47.94,42.24 47.94,38.73 46.67,38.73
  Top 0.254: JP2.15 47.62,44.77 46.04,43.18 46.04,42.28 U12.5 | 46.67,38.73 R46.1
N$71
  Top 0.191: U12.3 48.9,41.6 48.9,38.73 49.85,38.73
  Top 0.254: 49.85,38.73 R45.1 | JP2.16 50.16,43.81 51.44,42.62 51.44,41.59 50.46,41.59 U12.3
N$72
  Top 0.191: 56.76,40.31 56.76,39.77 57.42,39.77 57.42,27.57 57.17,27.33 57.15,27.3 55.88,26.04 54.61,26.04 54.61,29.84 R2.2 53.34,29.84 52.7,29.21 52.7,28.15 51.99,27.43 47.75,23.11
  Top 0.254: U15.1 56.76,40.31 | U23.14 43.18,16.76 47.75,21.34 47.75,23.11
N$73
  Top 0.254: 28.19,9.4 21.08,9.4 20.07,8.38 15.24,8.38 U13.11 | 28.19,9.4 29.21,8.38 U14.11 | 28.19,9.4 36.07,9.4 37.08,8.38 43.18,8.38 U23.11
  Bottom 0.254: 57.15,8.38 60.71,11.94 64.26,11.94 70.61,18.29 71.12,18.29 IC2.15 | 57.15,8.38 51.05,8.38 50.04,9.4 44.7,9.4 43.69,8.38 43.18,8.38 U23.11 | 57.15,8.38 U24.11
N$74
  Top 0.254: IC2.1 63.5,20.83 58.42,15.75 58.42,7.11 57.15,5.84 U24.10 | 28.19,6.86 21.08,6.86 20.07,5.84 15.24,5.84 U13.10 | 28.19,6.86 29.21,5.84 U14.10 | 28.19,6.86 36.07,6.86 37.08,5.84 43.18,5.84 U23.10
  Bottom 0.254: U24.10 57.15,5.59 51.05,5.59 50.04,4.57 44.2,4.57 43.18,5.59 U23.10
N$75
  Top 0.254: IC2.2 63.5,18.29 59.44,14.22 59.44,5.33 57.15,3.05 U24.9
  Bottom 0.254: 28.19,4.32 21.08,4.32 20.07,3.3 15.24,3.3 U13.9 | 28.19,4.32 29.21,3.3 U14.9 | 28.19,4.32 36.07,4.32 37.08,3.3 43.18,3.3 U23.9 43.18,3.05 44.2,2.03 50.04,2.03 51.05,3.05 57.15,3.05 U24.9
N$76  (via drill 0.3)
  Top 0.254: v47.75,14.48 v52.58,14.48
  Bottom 0.254: v52.58,14.48 57.4,14.48 58.67,15.75 63.5,15.75 IC2.3 | v47.75,14.48 34.54,14.48 29.46,9.4 8.64,9.4 7.62,8.38 U13.6
N$77  (via drill 0.3)
  Top 0.254: v53.59,9.4 53.59,7.62 v54.1,7.11
  Bottom 0.254: v53.59,9.4 57.4,9.4 61.21,13.21 63.5,13.21 IC2.4 | v54.1,7.11 22.61,7.11 21.59,8.13 U14.6
N$78  (via drill 0.3)
  Top 0.191: v51.82,34.81 51.44,34.81 51.44,40.96 52.43,40.96 | R5.2 51.82,34.92 v51.82,34.8
  Top 0.254: 52.43,40.96 U15.7 | U23.13 43.18,14.22 48.26,19.3 48.26,22.61 v51.82,26.16 | v51.82,34.8 v51.82,34.81
  Bottom 0.254: v51.82,34.8 v51.82,26.16
N$80
  Top 0.191: 56.81,41.59 54.61,41.59 54.61,38.73 56.2,38.73
  Top 0.254: 56.79,41.59 U15.3 56.81,41.59 57.47,41.59 57.78,41.91 57.78,43.81 55.37,46.23 JP3.2 | 56.2,38.73 R49.1
N$81
  Top 0.191: R50.1 54.13,38.68 54.13,42.23 52.43,42.23
  Top 0.254: 52.43,42.23 U15.5 52.7,42.52 JP3.1
N$83
  Top 0.191: 63.17,40.31 63.17,39.84 63.77,39.84 63.77,27.57 62.23,26.04 60.96,26.04 60.96,29.84 R7.2 59.69,29.84 59.05,29.21 59.05,25.78 50.55,17.27
  Top 0.254: U16.1 63.17,40.31 | 50.55,17.27 49.28,17.27 48.26,16.26 48.26,16 43.18,10.92 U23.12
N$84  (via drill 0.3)
  Top 0.191: 57.78,34.81 57.78,34.92 | 57.78,34.92 57.78,40.96 58.78,40.96 | v50.29,19.56 57.91,27.18 57.91,34.81 | 57.91,34.81 57.9,34.81 57.78,34.92 | R9.2 58.03,34.92 57.91,34.81
  Top 0.254: 58.78,40.96 U16.7
  Bottom 0.254: v50.29,19.56 49.02,19.56 48.01,18.54 43.18,18.54 U23.15
N$86
  Top 0.191: 63.16,41.59 60.96,41.59 60.96,38.73 62.55,38.73
  Top 0.254: JP3.4 60.45,46.23 63.5,43.18 64.14,43.18 64.14,41.91 63.82,41.59 63.16,41.59 U16.3 | 62.55,38.73 R53.1
N$87
  Top 0.191: R54.1 60.48,38.68 60.48,42.23 58.78,42.23
  Top 0.254: 58.78,42.23 U16.5 58.74,42.28 58.74,44.45 57.78,45.4 JP3.3
N$89  (via drill 0.3)
  Top 0.191: 69.41,40.31 69.41,39.82 70.12,39.82 70.12,27.58 68.58,26.04 67.31,26.04 67.31,29.84 R10.2 66.04,29.84 64.77,28.57 64.77,27.43 59.18,21.84
  Top 0.254: U17.1 69.41,40.31 | 59.18,21.84 v59.18,21.34
  Bottom 0.254: v59.18,21.34 57.66,19.81 56.9,19.81 51.82,14.73 49.28,14.73 44.2,9.65 42.67,9.65 41.66,10.67 35.56,10.67 U23.5
N$90  (via drill 0.3)
  Top 0.191: 64.52,34.81 64.14,34.81 64.14,40.96 65.13,40.96 | 64.52,34.81 v64.52,30.73 | R13.2 64.63,34.92 64.52,34.81
  Top 0.254: 65.13,40.96 U17.7 | v39.88,25.4 35.56,21.08 U23.1
  Bottom 0.254: v39.88,25.4 59.18,25.4 v64.52,30.73
N$92
  Top 0.191: 69.51,41.59 67.31,41.59 67.31,38.73 68.9,38.73
  Top 0.254: JP3.6 65.53,46.23 67.94,43.81 69.22,43.81 70.48,42.62 70.48,41.59 69.51,41.59 U17.3 | 68.9,38.73 R57.1
N$93
  Top 0.191: U17.5 66.83,42.24 66.83,38.73 65.72,38.73
  Top 0.254: 65.72,38.73 R58.1 | JP3.5 62.87,45.4 65.09,43.18 65.09,42.28 U17.5
N$95  (via drill 0.3)
  Top 0.191: U18.1 75.85,39.84 76.5,39.72 76.5,27.13 75.56,26.04 73.67,26.04 v73.62,26.08 73.66,26.12 73.66,29.84 R15.2
  Top 0.254: U18.1 | v46.99,22.86 43.94,19.81 42.93,19.81 36.58,13.46 35.56,13.46 U23.4
  Bottom 0.254: v46.99,22.86 56.13,22.86 56.64,23.37 61.72,23.37 61.98,23.11 70.61,23.11 v73.62,26.08
N$96  (via drill 0.3)
  Top 0.191: 71.48,40.96 70.48,40.96 70.48,34.81 71.37,34.81 71.49,34.92 R51.2
  Top 0.254: 71.48,40.96 U18.7 | v41.66,24.64 35.56,18.54 U23.2 | 71.37,34.81 v71.37,33.78
  Bottom 0.254: v41.66,24.64 62.99,24.64 64.01,25.65 67.56,25.65 71.63,29.72 71.63,33.53 v71.37,33.78
N$98
  Top 0.254: JP3.7 67.94,45.77 U18.5 73.18,42.24 73.18,38.73 72.07,38.73 R62.1
N$100
  Top 0.254: JP3.8 70.61,46.23 73.58,43.26 76.64,43.26 76.83,42.55 76.83,41.59 75.86,41.59 | 75.86,41.59 U18.3 | 75.86,41.59 73.66,41.59 73.66,38.73 75.25,38.73 R61.1
N$101
  Top 0.191: U19.1 82.18,39.87 82.83,39.87 82.83,27.58 81.28,26.04 80.01,26.04 | 61.72,21.34 63.25,22.86 69.22,22.86 70.48,24.13 78.74,24.13 80.01,25.4 80.01,26.04 | R55.2 80.01,29.84 80.01,26.04
  Top 0.254: U19.1 | 61.72,21.34 61.72,20.57 57.15,16 U24.14
N$102  (via drill 0.3)
  Top 0.191: 77.83,40.96 76.83,40.96 76.83,39.93 77.03,39.77 77.03,35.4 77.33,34.92 | R59.2 77.33,34.92 | 77.33,34.92 77.22,34.81
  Top 0.254: 77.83,40.96 U19.7 | U24.13 57.15,14.22 55.88,15.49 55.88,16.26 56.9,17.27 57.66,17.27 61.21,20.83 61.21,21.84 v63.17,23.88 | 77.22,34.81 v77.22,30.73
  Bottom 0.254: v63.17,23.88 70.48,23.92 v77.22,30.73
N$104
  Top 0.254: JP3.9 73.03,46.35 75.25,44.13 76.56,44.13 77.83,42.86 U19.5 78.42,42.24 78.42,42.23 79.38,42.23 79.38,38.73 78.42,38.73 R66.1
N$106
  Top 0.254: JP3.10 75.69,46.23 78.7,43.26 82.99,43.26 83.19,42.55 83.19,41.59 82.21,41.59 U19.3 80.49,41.6 80.49,38.73 81.6,38.73 R65.1
N$107  (via drill 0.3)
  Top 0.191: U20.1 88.55,39.75 89.18,39.75 89.18,27.58 87.63,26.04 86.36,26.04 86.36,29.84 R63.2 85.09,29.84 84.45,29.21 84.45,25.24 82.11,22.9
  Top 0.254: U20.1 | v60.96,14.73 64.52,14.73 69.34,19.56 69.34,21.34 70.91,22.9 82.11,22.9
  Bottom 0.254: v60.96,14.73 57.15,10.92 U24.12
N$108  (via drill 0.3)
  Top 0.191: 83.31,34.81 83.19,34.81 83.19,40.96 84.18,40.96 | 83.31,34.81 83.31,27.18 | R67.2 83.43,34.92 83.31,34.81
  Top 0.254: 84.18,40.96 U20.7 | 83.31,27.18 83.31,25.53 81.28,23.5 70.74,23.5 v67.06,19.81
  Bottom 0.254: v67.06,19.81 62.74,19.81 61.47,18.54 57.15,18.54 U24.15
N$110
  Top 0.191: 83.16,43.81 83.2,43.81
  Top 0.254: R70.1 86.04,38.68 85.63,41.91 84.77,42.23 84.77,42.24 | U20.5 84.77,42.24 | JP3.11 78.61,46.48 81.28,43.81 83.16,43.81 | 83.2,43.81 84.77,42.24
N$112
  Top 0.254: JP3.12 80.77,46.23 82.55,44.45 83.82,44.45 86.68,41.59 88.53,41.59 U20.3 86.84,41.6 86.84,38.73 87.95,38.73 R69.1
N$113  (via drill 0.3)
  Top 0.191: 94.93,40.31 94.93,39.84 95.53,39.84 95.65,39.73 95.65,35.4 95.57,34.92 95.57,27.62 93.98,26.04 92.71,26.04 92.71,29.84 R71.2 91.44,29.84 90.17,28.57 90.17,24.64 v87.63,22.1
  Top 0.254: U21.1 94.93,40.31 | v55.88,4.32 49.53,10.67 U24.5
  Bottom 0.254: v55.88,4.32 58.93,4.32 61.98,1.27 75.18,1.27 87.63,13.72 v87.63,22.1
N$114  (via drill 0.3)
  Top 0.191: 89.92,34.81 89.53,34.81 89.53,40.96 90.53,40.96 | 89.92,34.81 v89.92,30.73 | v77.22,25.02 63.37,25.02 v62.23,23.88 | R75.2 90.03,34.92 89.92,34.81
  Top 0.254: 90.53,40.96 U21.7 | v52.32,23.88 49.53,21.08 U24.1
  Bottom 0.254: v62.23,23.88 v52.32,23.88 | v89.92,30.73 85.34,26.16 84.22,25.04 77.24,25.04 v77.22,25.02
N$116
  Top 0.254: R74.1 92.71,38.68 91.71,42.23 91.12,42.23 91.12,42.24 U21.5 89.59,43.18 86.36,43.18 83.19,46.35 JP3.13
N$118
  Top 0.254: U21.3 93.34,41.6 | 93.34,41.6 93.34,38.73 94.3,38.73 R73.1 | JP3.14 85.85,46.23 88.27,43.81 90.81,43.81 92.71,41.91 92.71,41.59 93.33,41.59 93.34,41.6
N$119  (via drill 0.3)
  Top 0.191: 101.35,40.31 101.35,39.89 102.23,39.89 102.23,27.94 100.33,26.04 99.06,26.04 | 99.06,26.04 99.06,29.84 R80.2 | 99.06,26.04 97.92,26.04 97.79,25.91
  Top 0.254: U22.1 101.35,40.31 | v58.67,5.59 57.66,4.57 56.64,4.57 55.88,5.33 55.88,8.13 50.8,13.21 49.53,13.21 U24.4 | v62.23,2.03 86.11,2.03 97.79,13.72 97.79,25.91
  Bottom 0.254: v62.23,2.03 v58.67,5.59
N$120  (via drill 0.3)
  Top 0.191: 96.88,40.96 95.89,40.96 95.89,40.01 96.08,39.81 96.08,35.12 96.2,35 96.01,34.81 | 96.01,34.81 96.01,27.18 | R81.2 96.13,34.92 96.01,34.81
  Top 0.254: 96.88,40.96 U22.7 | v55.12,16.26 v51.56,16.26 | v67.82,17.02 67.82,6.86 70.1,4.57 86.11,4.57 95.25,13.72 95.25,26.42 96.01,27.18
  Bottom 0.254: v51.56,16.26 49.53,18.29 U24.2 | v55.12,16.26 55.88,16.26 56.64,17.02 v67.82,17.02
N$122
  Top 0.191: R78.1 98.3,38.68 98.3,42.23 97.47,42.23
  Top 0.254: 97.47,42.23 97.47,42.24 U22.5 95.94,43.18 92.71,43.18 91.44,44.45 90.17,44.45 88.27,46.35 JP3.15
N$124
  Top 0.191: U22.3 99.54,41.6 99.54,38.73 100.65,38.73
  Top 0.254: JP3.16 90.93,46.23 93.34,43.81 97.47,43.81 98.74,42.55 98.74,42.23 99.38,41.59 101.23,41.59 U22.3 | 100.65,38.73 R77.1
N$125
  Top 0.254: IC2.5 63.5,10.67 59.94,7.11 59.94,3.81 57.15,1.02 55.88,1.02 49.78,7.11 36.58,7.11 35.56,8.13 U23.6
N$126
  Bottom 0.254: IC2.6 63.5,8.13 58.67,8.13 57.66,7.11 55.12,7.11 54.36,7.87 49.78,7.87 49.53,8.13 U24.6
N$127
  Top 0.254: MOTHERBOARD.3 86.36,14.99 78.49,7.11 70.1,7.11 69.34,7.87 69.34,8.89 71.12,10.67 IC2.12
SHIFT_CLK
  Top 0.254: MOTHERBOARD.2 83.82,14.99 77.22,8.38 71.12,8.38 IC2.11
SHIFT_SER
  Top 0.254: MOTHERBOARD.1 80.77,15.75 71.12,15.75 IC2.14

## Text on the board
tNames: U5 | U6 | U7 | U8 | U9 | U10 | U11 | U12 | U15 | U16 | U17 | U18 | U19 | U20 | U21 | U22 | wiretouch mainboard | www.wiretouch.net | P1 | P8 | wiretouch sensor board | 74HC4051N | 74HC4051N | 74HC4051N | 74HC4051N | v1.2 | Armin B. Wagner | Georg Kaindl